# EAGLE board Controller (EAGLE 7.1.0)
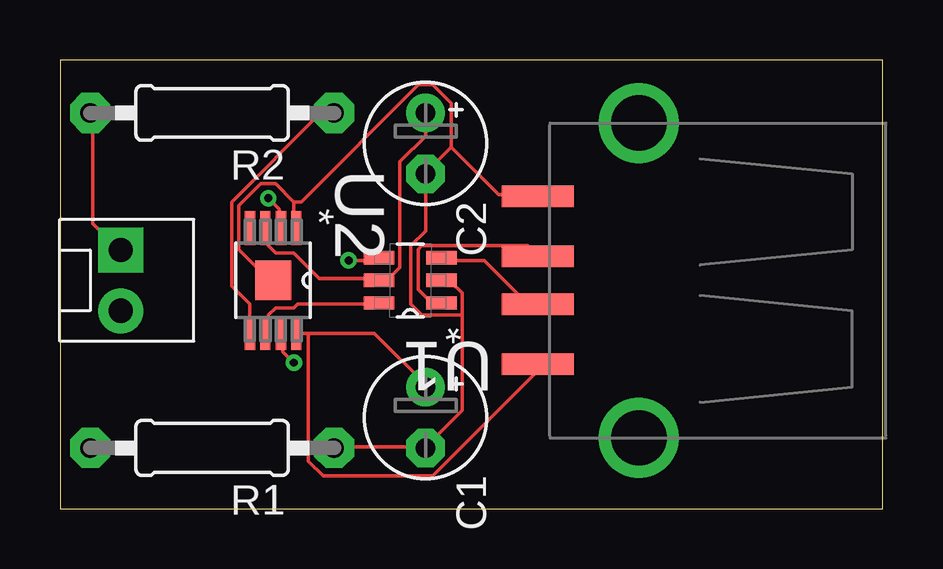
[diagram p0: board, top side]
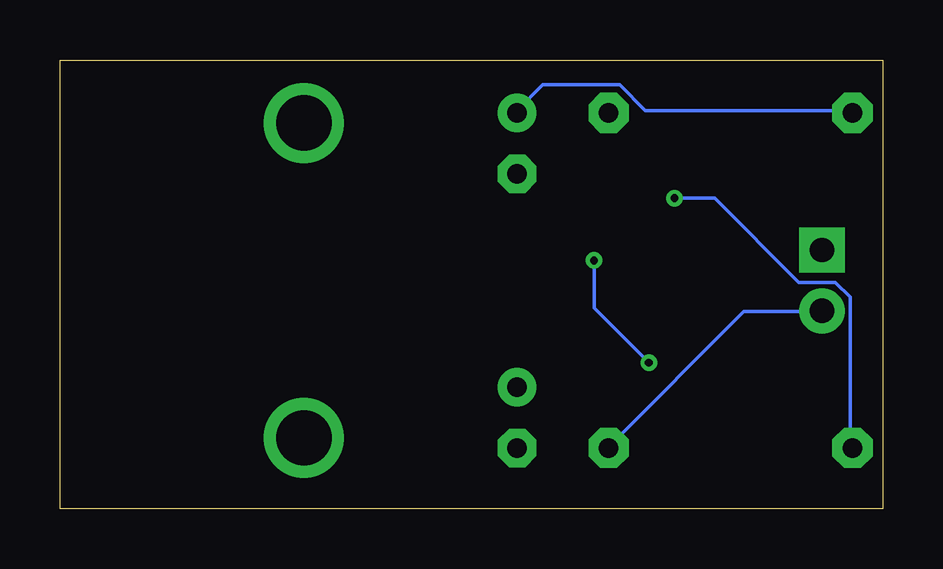
[diagram p1: board, bottom side, seen from below]

Size 34.28 x 18.72 mm. Coordinates in mm from the lower left corner, seen from the top.
Outline: 34.28,0 34.28,18.72 0,18.72 0,0 34.28,0
Copper layers (1*16): Top 0.0356mm / dielectric 1.5011mm / Bottom 0.0356mm
Design rules "LaenPCBOrder": minimum track width 6mil, minimum drill 13mil, track to track 6mil, track to pad 6mil, pad to pad 6mil, via to via 6mil, smd to smd 6mil, copper to edge 15mil, drill to drill 6mil, minimum pad ring 7mil, minimum via ring 7mil, stop-mask expansion 3mil, vias tented up to drill 0mil, thermal gap 10mil

## Footprints (pad centres in the part's own frame; a part is rotated, then mirrored left to right if it is on the bottom)
E2,5-5 = drill 0.813 pad 1.6: + -1.27,0 | drill 0.813 pad 1.6 octagon: - 1.27,0
MOLEX-1X2 = drill 1.016 pad 1.88 square: 1 0,0 | drill 1.016 pad 1.88: 2 2.54,0
0207/10 = drill 0.813 pad 1.676 octagon: 1 -5.08,0; 2 5.08,0
SOT95P280X145-6N = smd 1.27 x 0.559: 1 -1.295,0.94; 2 -1.295,0; 3 -1.295,-0.94; 4 1.295,-0.94; 5 1.295,0; 6 1.295,0.94
SOP65P490X110-9N = smd 1.422 x 0.432: 1 -2.184,0.965; 2 -2.184,0.33; 3 -2.184,-0.33; 4 -2.184,-0.965; 5 2.184,-0.965; 6 2.184,-0.33; 7 2.184,0.33; 8 2.184,0.965 | smd 1.651 x 1.499: 9 0,0
USB-A-S-NOSILK-FEMALE = smd 3 x 0.9: D+ 4.212,-1; D- 4.212,1; GND 4.212,-3.5; VBUS 4.212,3.5 | drill 2.311: S1 0,-6.566; S2 0,6.566

## Placement (x,y rotation side)
C1  22 uF  [E2,5-5]  15.23,3.81 270 top
C2  0.1 uF  [E2,5-5]  15.23,15.24 270 top
FRAME1  FRAME-LETTER  [CREATIVE_COMMONS]  33.01,-8.89 0 top  (outside the outline)
JP1  M02POLAR  [MOLEX-1X2]  2.53,10.79 270 top
R1  22 kOhm  [0207/10]  6.34,2.54 180 top
R2  100 kOhm  [0207/10]  6.34,16.51 180 top
U1  TPD4S009DBVR  [SOT95P280X145-6N]  14.6,9.53 180 top
U2  TPS2511DGN  [SOP65P490X110-9N]  8.88,9.53 270 top
U$2  USB+SHIELDUSB-A-S-NOSILK-FEMALE  [USB-A-S-NOSILK-FEMALE]  24.12,9.53 180 top

## Library data of the parts
C1 C2 R1 R2 = adafruit
FRAME1 = SparkFun-Aesthetics
JP1 U$2 = SparkFun-Connectors
U1 = Texas Instruments_By_element14_Batch_1; MPN: TPD4S009DBVR; OC_FARNELL: 1855143; OC_NEWARK: 33R2191; PACKAGE: SOT-23-6; SUPPLIER: TEXAS INSTRUMENTS
U2 = TI-TPS2511DGN; MPN: TPS2511DGN; OC_FARNELL: 2211372; OC_NEWARK: 44W8612; PACKAGE: MSOP-8; SUPPLIER: TEXAS INSTRUMENTS

## Nets
N$1: R2.1 U2.5
N$3: C2.+ JP1.1 R2.2 U1.5 U2.3
N$4: U1.6 U2.6
N$5: U1.4 U2.7
N$6: R1.2 U2.2
N$7: C1.- C2.- JP1.2 R1.1 U1.2 U2.1 U2.9 U$2.GND
N$8: U1.1 U$2.D+
N$9: U1.3 U$2.D-
N$12: C1.+ U2.8 U$2.VBUS

## Tracks (layer width: path | path; a pad name or v marks a point on that pad's centre or on a via)
N$1
  Top 0.152: U2.5 7.92,8.53 7.15,9.3 7.15,12.8 10.81,16.46 11.42,16.46 R2.1
N$3
  Top 0.152: R2.2 1.36,16.46 1.36,11.89 2.43,10.82 JP1.1 | U2.3 8.68,11.58 8.68,10.97 8.98,10.67 9.74,10.67 10.81,9.6 13.25,9.6 U1.5 13.4,9.6 13.71,9.6 14.16,10.06 14.16,14.48 15.23,15.54 C2.+
  Bottom 0.152: R2.2 1.36,16.61 9.9,16.61 10.96,17.68 14.16,17.68 15.23,16.61 C2.+
N$4
  Top 0.152: U1.6 13.25,8.53 9.9,8.53 9.74,8.38 8.98,8.38 8.68,8.08 8.68,7.47 U2.6
N$5  (via drill 0.33)
  Top 0.152: v12.03,10.36 13.25,10.36 U1.4 | v9.74,6.1 9.29,6.55 9.29,7.32 U2.7
  Bottom 0.152: v12.03,10.36 12.03,8.38 v9.74,6.1
N$6  (via drill 0.33)
  Top 0.152: v8.68,12.95 9.13,12.5 9.13,11.73 U2.2
  Bottom 0.152: v8.68,12.95 7,12.95 3.5,9.45 1.97,9.45 1.36,8.84 1.36,2.59 R1.2
N$7
  Top 0.152: 9.74,12.8 9.74,11.73 U2.1 | 9.74,12.8 8.98,13.56 8.37,13.56 7.46,12.65 7.46,10.82 8.83,9.45 U2.9 | 9.74,12.8 10.05,12.8 14.93,17.68 15.54,17.68 16.3,16.92 16.3,15.09 | 16.3,15.09 15.23,14.02 C2.- 15.23,11.58 14.62,10.97 14.62,8.53 15.08,8.08 16.75,8.08 | 16.3,15.09 18.28,13.11 19.8,13.11 U$2.GND | 16.75,8.08 16.75,4.12 15.23,2.59 | 16.75,8.08 16.75,8.99 16.3,9.45 15.99,9.45 U1.2 | 15.23,2.59 11.42,2.59 R1.1 | 15.23,2.59 C1.-
  Bottom 0.152: JP1.2 2.58,8.23 5.78,8.23 11.42,2.59 R1.1
N$8
  Top 0.152: U1.1 15.84,8.69 15.38,8.69 14.93,9.14 14.93,10.82 15.08,10.97 19.5,10.97 19.8,10.67 U$2.D+
N$9
  Top 0.152: U1.3 15.99,10.36 17.67,10.36 19.5,8.53 19.8,8.53 U$2.D-
N$12
  Top 0.152: 10.35,7.32 13.1,7.32 15.23,5.18 C1.+ | 10.35,7.32 9.9,7.32 U2.8 | 10.35,7.32 10.35,1.98 10.96,1.37 15.54,1.37 19.8,5.64 19.8,5.94 U$2.VBUS